# EAGLE board V1.2_Esquema general (EAGLE 5.11)
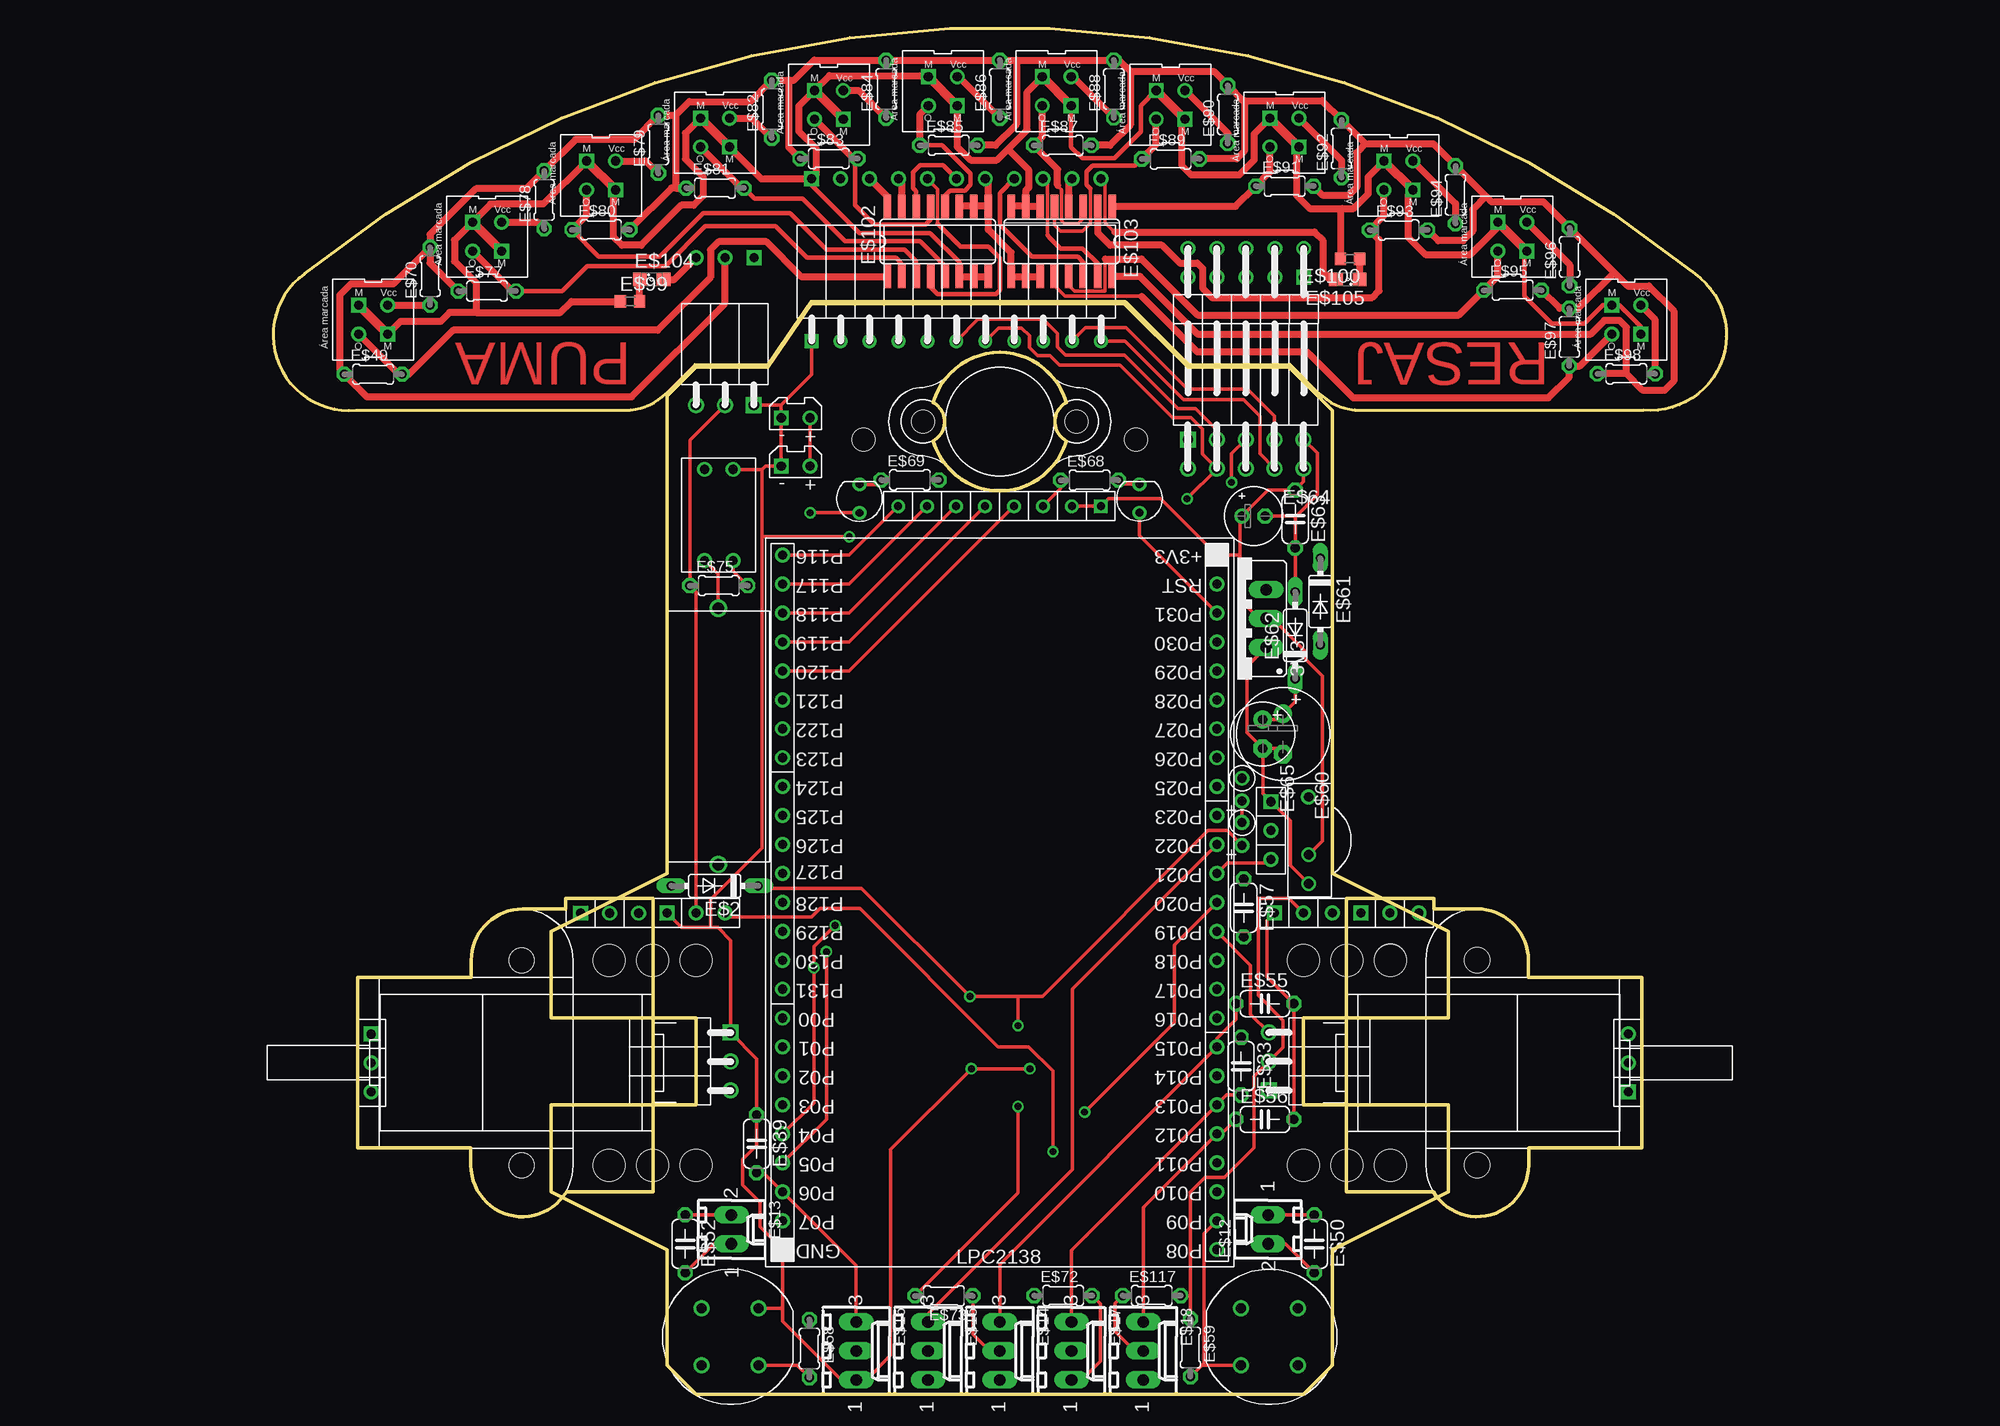
[diagram p0: board, top side]
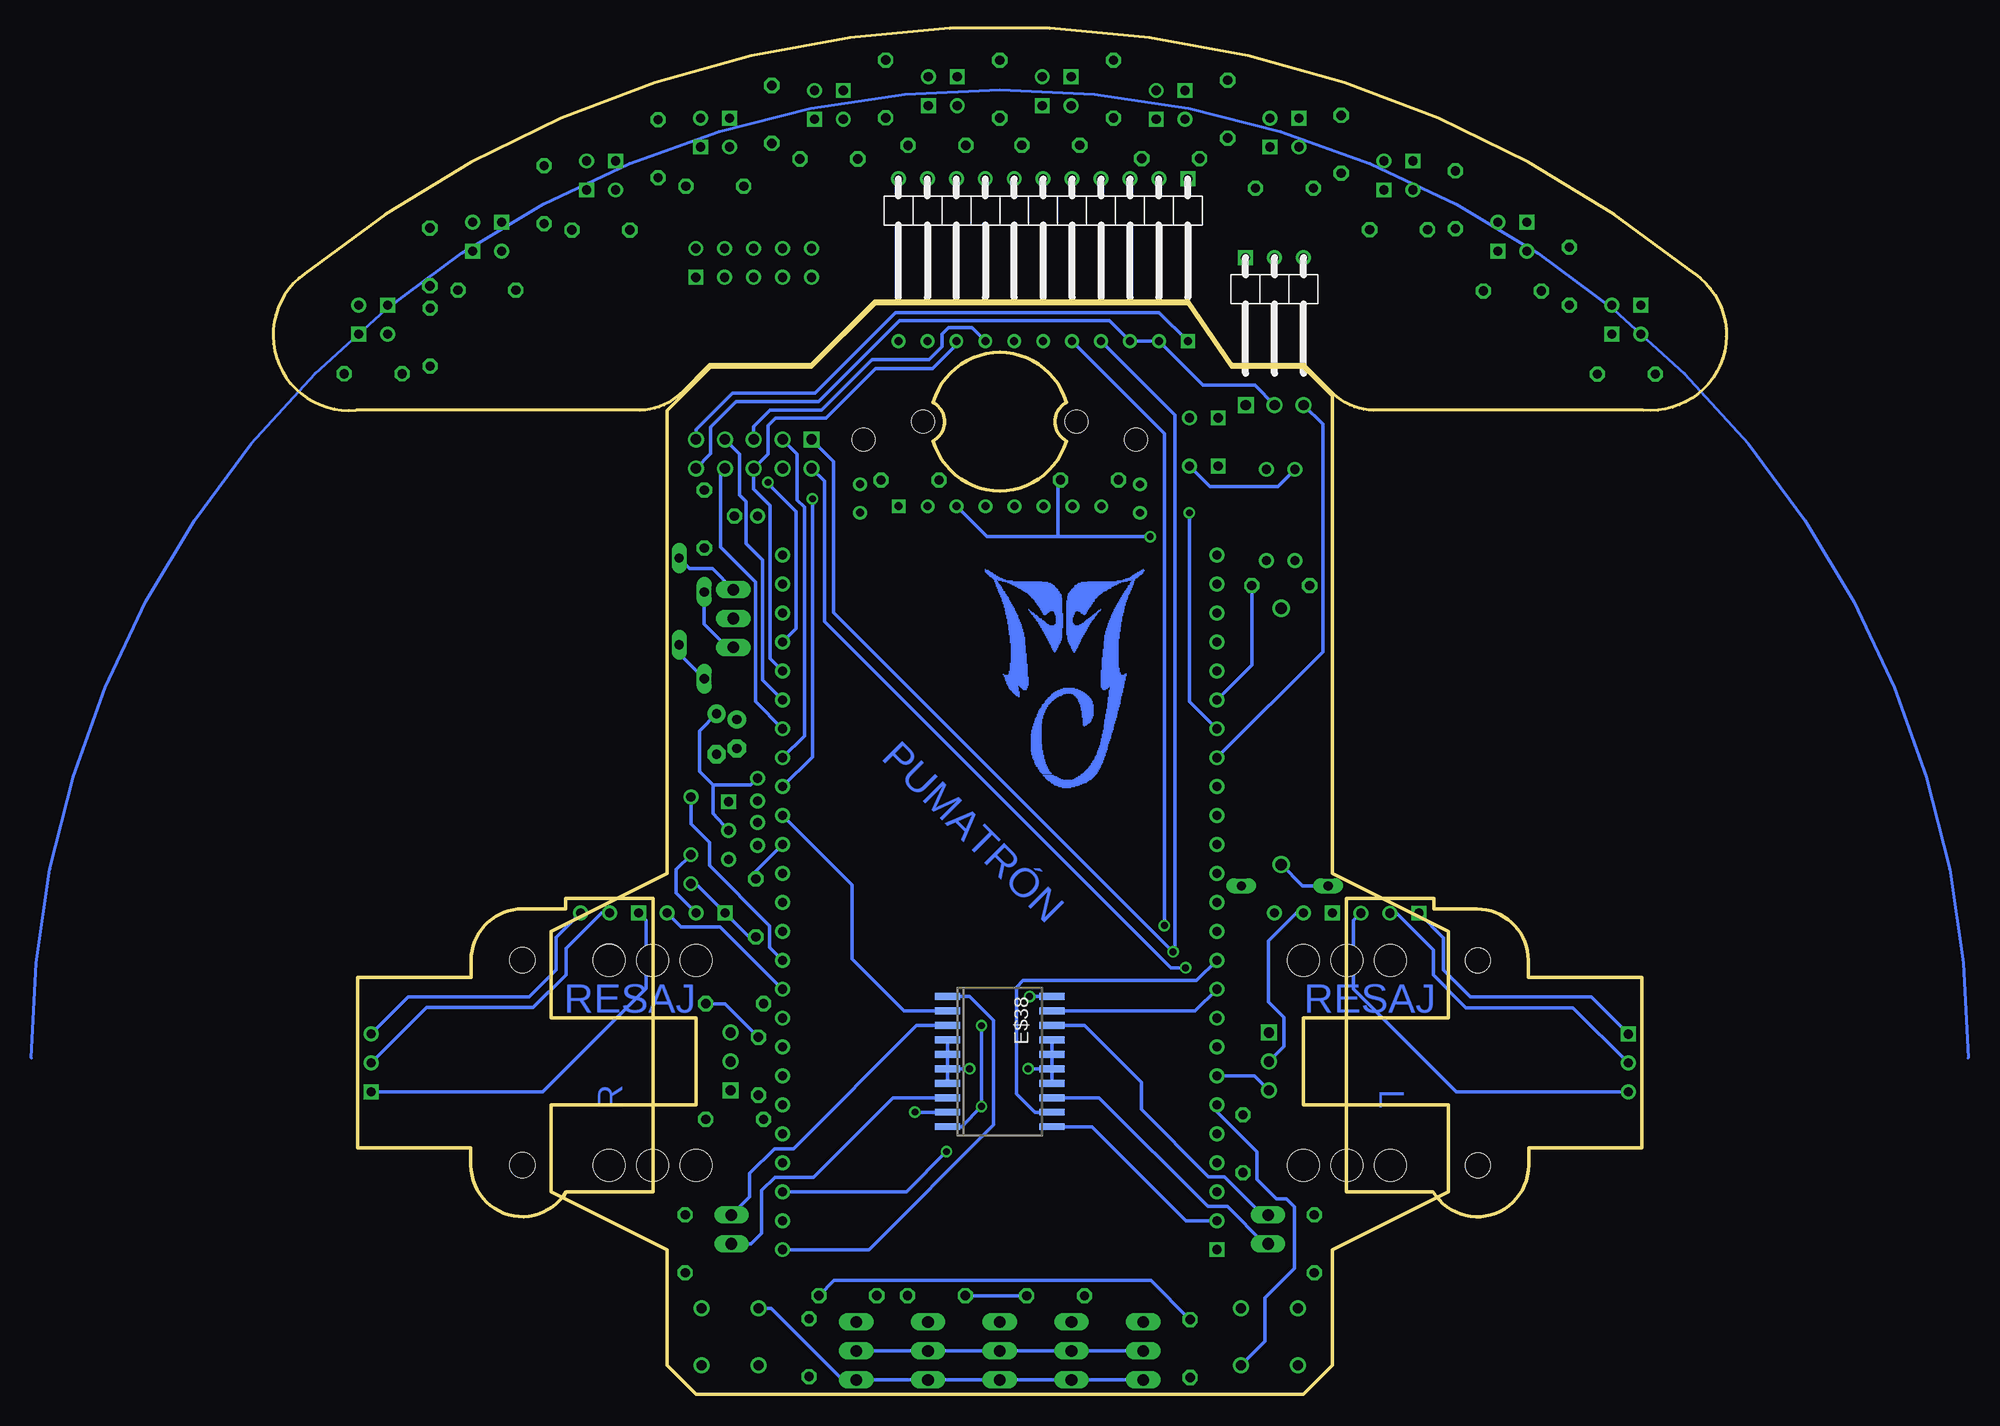
[diagram p1: board, bottom side, seen from below]

Size 127.55 x 119.9 mm. Coordinates in mm from the lower left corner, seen from the top.
Outline: 110.2,36.61 120.16,36.61 120.16,21.62 110.2,21.62 110.2,20.1 arc-149 101.82,17.79 94.2,17.79 94.2,43.54 101.87,43.54 101.87,42.6 105.68,42.6 arc-90 110.17,38.11 110.17,36.61
Outline: 17.35,36.6 7.4,36.6 7.4,21.61 17.35,21.61 17.35,20.09 arc149 25.74,17.78 33.36,17.78 33.36,43.53 25.68,43.53 25.68,42.59 21.87,42.59 arc90 17.38,38.1 17.38,36.6
Outline: 34.57,45.72 24.41,40.64 24.41,33.02 37.11,33.02 37.11,25.4 24.41,25.4 24.41,17.78 34.57,12.7 34.57,2.54 37.11,0 90.45,0 92.99,2.54 92.99,12.7 103.15,17.78 103.15,25.4 90.45,25.4 90.45,33.02 103.15,33.02 103.15,40.64 92.99,45.72 92.99,86.36 89.18,90.17 80.29,90.17 74.7,95.76 47.27,95.76 43.46,90.17 37.11,90.17 34.57,87.63 34.57,45.72
Outline: 69.62,87.07 arc148 57.93,87.07 arc-122 57.93,83.69 arc148 69.62,83.69 arc-122 69.62,87.07
Outline: 2.78,98.39 arc-78 124.78,98.39 arc-150 120.28,86.39 95.35,86.39 arc-45 91.81,87.86 89.28,90.39 80.38,90.37 74.81,95.94 47.2,95.94 43.4,90.39 37.03,90.39 34.49,87.86 arc-45 30.95,86.39 7.28,86.39 arc-150 2.78,98.39
Copper layers (1*16): Top 0.035mm / dielectric 1.5mm / Bottom 0.035mm
Design rules "default": minimum track width 10mil, minimum drill 24mil, track to track 8mil, track to pad 8mil, pad to pad 8mil, via to via 8mil, smd to smd 8mil, copper to edge 40mil, drill to drill 8mil, minimum pad ring 10mil, minimum via ring 8mil, stop-mask expansion 4mil, vias tented up to drill 0mil, thermal gap 10mil
Holes 2.8 mm at 90.45,38.1 90.45,20.09 94.26,38.1 94.26,20.09 37.11,38.1 33.3,38.1 37.11,20.09 33.3,20.09 29.49,38.1 29.49,20.09 98.07,38.1 98.07,20.09 98.06,38.11 98.06,20.1 29.49,38.1 29.49,20.09
Holes 2 mm at 51.84,83.82 75.71,83.82

## Footprints (pad centres in the part's own frame; a part is rotated, then mirrored left to right if it is on the bottom)
TO220S = drill 1.016 long: 1 -2.54,-2.54; 2 0,-2.54; 3 2.54,-2.54
LPC2138 = drill 0.8 square: P$1 30.48,-10.16 | drill 0.8 round: P$2 -27.94,-10.16; P$3 -25.4,-10.16; P$4 -22.86,-10.16; P$5 -20.32,-10.16; P$6 -17.78,-10.16; P$7 -15.24,-10.16; P$8 -12.7,-10.16; P$9 -10.16,-10.16; P$10 -7.62,-10.16; P$11 -5.08,-10.16; P$12 -2.54,-10.16; P$13 0,-10.16; P$14 2.54,-10.16; P$15 5.08,-10.16; P$16 7.62,-10.16; P$17 10.16,-10.16; P$18 12.7,-10.16; P$19 15.24,-10.16; P$20 17.78,-10.16; P$21 20.32,-10.16; P$22 22.86,-10.16; P$23 25.4,-10.16; P$24 27.94,-10.16; P$25 -30.48,-10.16; P$26 30.48,27.94; P$27 27.94,27.94; P$28 25.4,27.94; P$29 22.86,27.94; P$30 20.32,27.94; P$31 17.78,27.94; P$32 15.24,27.94; P$33 12.7,27.94; P$34 10.16,27.94; P$35 7.62,27.94; P$36 5.08,27.94; P$37 2.54,27.94; P$38 0,27.94; P$39 -2.54,27.94; P$40 -5.08,27.94; P$41 -7.62,27.94; P$42 -10.16,27.94; P$43 -12.7,27.94; P$44 -15.24,27.94; P$45 -17.78,27.94; P$46 -20.32,27.94; P$47 -22.86,27.94; P$48 -25.4,27.94; P$49 -27.94,27.94; P$50 -30.48,27.94
DO35-7B = drill 0.813 long: A 3.81,0; C -3.81,0
DIODO_VERTICAL = drill 0.8 round: P$1 0,0; P$2 2,0
TIRADE3PINESHEMBRATUMBADOS = drill 0.9 round: P$1 1.27,-1.778; P$2 3.81,-1.778 | drill 0.9 square: P$3 6.35,-1.778
PULSADOR = drill 0.9 round: P$1 0,0; P$2 0,5; P$3 5,5; P$4 5,0
RUEDA_LOCA_0.375'' = hole 2: -6.75,0; 6.75,0
TSOP31238 = drill 0.8 round: P$1 1.2,1.8; P$3 6.274,1.803; P$4 8.814,1.803
CNY70 = drill 0.8 square: P$1 -1.27,1.27; P$2 1.27,-1.27 | drill 0.8 round: P$3 1.27,1.27; P$4 -1.27,-1.27
SOPORTE_FUSIBLE = drill 1 round: P$2 -0.25,4.5; P$3 22.25,4.5
6410-02 = drill 1.016 long: 1 1.27,0; 2 -1.27,0
6410-03 = drill 1.016 long: 1 2.54,0; 2 0,0; 3 -2.54,0
TIRADE3PINES = drill 0.8 square: P$1 1.27,1.27 | drill 0.8 round: P$2 3.81,1.27; P$3 6.35,1.27
SOPORTE_EXTENDIDO_MICROMOTOR = hole 2.2: -1.5,4.5; 16.5,4.5
TIRADE11PINESTUMBADOS = drill 0.7 square: P$1 1.27,-2.032 | drill 0.7 round: P$2 3.81,-2.032; P$3 6.35,-2.032; P$4 8.89,-2.032; P$5 11.43,-2.032; P$6 13.97,-2.032; P$7 16.51,-2.032; P$8 19.05,-2.032; P$9 21.59,-2.032; P$10 24.13,-2.032; P$11 26.67,-2.032
BATERIA_LIPO = drill 0.8 square: P$1 0,0 | drill 0.8 round: P$2 2.54,0
C050-024X044 = drill 0.813 octagon: 1 -2.54,0; 2 2.54,0
CON_RT_ANG_2X5 = drill 0.9 square: P$1 1.27,-1.27 | drill 0.9 round: P$2 3.81,-1.27; P$3 6.35,-1.27; P$4 8.89,-1.27; P$5 11.43,-1.27; P$6 11.43,-3.81; P$7 8.89,-3.81; P$8 6.35,-3.81; P$9 3.81,-3.81; P$10 1.27,-3.81
TIRADE8PINES = drill 0.7 square: P$1 1.27,1.27 | drill 0.7 round: P$2 3.81,1.27; P$3 6.35,1.27; P$4 8.89,1.27; P$5 11.43,1.27; P$6 13.97,1.27; P$7 16.51,1.27; P$8 19.05,1.27
SO20W = smd 0.6 x 2.2: 1 -5.715,-4.6; 2 -4.445,-4.6; 3 -3.175,-4.6; 4 -1.905,-4.6; 5 -0.635,-4.6; 6 0.635,-4.6; 7 1.905,-4.6; 8 3.175,-4.6; 9 4.445,-4.6; 10 5.715,-4.6; 11 5.715,4.6; 12 4.445,4.6; 13 3.175,4.6; 14 1.905,4.6; 15 0.635,4.6; 16 -0.635,4.6; 17 -1.905,4.6; 18 -3.175,4.6; 19 -4.445,4.6; 20 -5.715,4.6
TIRADE3PINESTUMBADOS = drill 0.8 round: P$1 1.27,-1.524; P$2 3.81,-1.524 | drill 0.8 square: P$3 6.35,-1.524
CON_M_RT_ANG_2X5 = drill 0.8 round: P$1 -4.064,11.43; P$3 -1.524,8.89; P$4 -4.064,8.89; P$5 -4.064,6.35; P$6 -4.064,3.81; P$7 -4.064,1.27; P$8 -1.524,1.27; P$9 -1.524,3.81; P$10 -1.524,6.35 | drill 0.8 square: P$2 -1.524,11.43
0204/5 = drill 0.813 octagon: 1 -2.54,0; 2 2.54,0
E3,5-8 = drill 0.813 pad 1.6 round: + -1.778,0 | drill 0.813 pad 1.6 octagon: - 1.778,0
DO35Z7 = drill 0.813 long: A 3.81,0; C -3.81,0
E2-5 = drill 0.813 pad 1.27 round: + -1.016,0 | drill 0.813 pad 1.27 octagon: - 1.016,0
E2,5-6 = drill 0.813 pad 1.6 round: + -1.27,0 | drill 0.813 pad 1.6 octagon: - 1.27,0
LED = drill 0.7 round: P$1 0,1.25; P$2 0,-1.25
MICROINTERRUPTOR_DOBLE = drill 0.8 round: P$1 1,2; P$2 1,4.5; P$3 9,4.5; P$4 9,2
R0603 = smd 1 x 1.1: 1 -0.85,0; 2 0.85,0
11_PINES_MACHO_TUMBADOS = drill 0.8 round: P$1 3.81,-1.524; P$2 6.35,-1.524; P$3 8.89,-1.524; P$4 11.43,-1.524; P$5 13.97,-1.524; P$6 16.51,-1.524; P$7 19.05,-1.524; P$8 21.59,-1.524; P$9 24.13,-1.524; P$10 26.67,-1.524 | drill 0.8 square: P$11 1.27,-1.524
SO16 = smd 0.66 x 2.032: 1 -4.445,-3.073; 2 -3.175,-3.073; 3 -1.905,-3.073; 4 -0.635,-3.073; 5 0.635,-3.073; 6 1.905,-3.073; 7 3.175,-3.073; 8 4.445,-3.073; 9 4.445,3.073; 10 3.175,3.073; 11 1.905,3.073; 12 0.635,3.073; 13 -0.635,3.073; 14 -1.905,3.073; 15 -3.175,3.073; 16 -4.445,3.073
SML0805 = smd 1.2 x 1.2: A 1.05,0; C -1.05,0

## Placement (x,y rotation side)
3V3  [TO220S]  84.63,68.1 90 top
E$1  [LPC2138]  54.89,43.18 270 top
E$2  [DO35-7B]  38.76,44.63 180 top
E$3  [DIODO_VERTICAL]  85.03,50.19 270 top
E$4  [TIRADE3PINESHEMBRATUMBADOS]  35.84,88.62 0 top
E$5  [MICROMOTOR]  94.2,35.09 270 top
E$6  [PULSADOR]  37.61,7.54 270 top
E$7  [PULSADOR]  89.94,2.54 90 top
E$8  [RUEDA_LOCA_0.375'']  63.78,85.39 0 top
E$9  [TSOP31238]  89.09,53.64 270 top
E$10  [CNY70]  28.78,106.99 0 top
E$11  [SOPORTE_FUSIBLE]  34.57,68.75 270 top
E$12  [6410-02]  87.32,14.48 90 top
E$13  [6410-02]  40.23,14.48 270 top
E$14  [6410-03]  63.78,3.81 270 top
E$15  [6410-03]  57.48,3.81 270 top
E$16  [6410-03]  51.18,3.81 270 top
E$17  [6410-03]  70.07,3.81 270 top
E$18  [6410-03]  76.37,3.81 270 top
E$19  [TIRADE3PINES]  94.22,40.98 0 top
E$20  [CNY70]  88.78,110.76 0 top
E$21  [SOPORTE_EXTENDIDO_MICROMOTOR]  101.18,36.61 270 top
E$22  [CNY70]  98.78,106.99 0 top
E$23  [CNY70]  108.78,101.63 0 top
E$24  [TIRADE11PINESTUMBADOS]  46,94.49 0 top
E$25  [BATERIA_LIPO]  44.6,85.71 0 top
E$26  [BATERIA_LIPO]  44.6,81.48 0 top
E$27  [TIRADE3PINES]  120.21,25.28 90 top
E$28  [CNY70]  78.78,113.18 0 top
E$29  [TIRADE3PINES]  86.61,40.97 0 top
E$30  [TIRADE3PINES]  86.3,53.29 270 top
E$31  [MICROMOTOR]  33.38,23.11 90 top
E$32  [TIRADE3PINES]  33.32,40.97 0 top
E$33  [C050-024X044]  84.96,28.8 270 top
E$34  [TIRADE3PINESHEMBRATUMBADOS]  89.18,33.02 270 top
E$35  [CON_RT_ANG_2X5]  79.02,85.09 0 top
E$36  [TIRADE8PINES]  73.91,79.22 180 top
E$37  [TIRADE3PINESHEMBRATUMBADOS]  38.38,25.4 90 top
E$38  [SO20W]  63.78,29.21 270 bottom
E$39  [C050-024X044]  42.44,22 270 top
E$40  [CNY70]  68.78,114.37 0 top
E$41  [CNY70]  58.78,114.37 0 top
E$42  [CNY70]  118.78,94.33 0 top
E$43  [CNY70]  48.78,113.18 0 top
E$44  [TIRADE3PINESTUMBADOS]  35.85,98.26 180 bottom
E$45  [CON_M_RT_ANG_2X5]  79.03,96.52 270 top
E$46  [CNY70]  38.78,110.76 0 top
E$47  [CNY70]  18.78,101.63 0 top
E$48  [CNY70]  8.78,94.33 0 top
E$49  [0204/5]  8.78,89.54 0 top
E$50  [C050-024X044]  91.38,13.21 270 top
E$51  [SOPORTE_EXTENDIDO_MICROMOTOR]  26.32,21.59 90 top
E$52  [C050-024X044]  36.17,13.21 270 top
E$53  [TIRADE3PINES]  25.71,40.97 0 top
E$54  [TIRADE3PINES]  7.35,32.89 270 top
E$55  [C050-024X044]  87.04,34.29 0 top
E$56  [C050-024X044]  87.04,24.13 0 top
E$57  [C050-024X044]  85.19,42.7 270 top
E$58  [0204/5]  47.06,4.01 270 top
E$59  [0204/5]  80.51,4.09 270 top
E$60  [E3,5-8]  88.64,57.96 270 top
E$61  [DO35-7B]  91.92,69.6 270 top
E$62  [DO35Z7]  89.71,66.62 90 top
E$63  [C050-024X044]  89.71,76.84 270 top
E$64  [E2-5]  86.05,77.09 0 top
E$65  [E2,5-6]  86.86,57.96 270 top
E$66  [LED]  76.04,78.64 0 top
E$67  [LED]  51.46,78.63 0 top
E$68  [0204/5]  71.66,80.24 0 top
E$69  [0204/5]  55.89,80.27 0 top
E$70  [0204/5]  13.78,98.15 90 top
E$71  [IMAGEN_MJ_GRANDE]  58.11,67.13 0 bottom
E$72  [0204/5]  69.34,8.66 0 top
E$73  [0204/5]  58.87,8.64 180 top
E$74  [MICROINTERRUPTOR_DOBLE]  35.86,82.19 270 top
E$75  [0204/5]  39.11,70.99 0 top
E$76  [DIODO_VERTICAL]  85.03,54.08 270 top
E$77  [0204/5]  18.78,96.85 0 top
E$78  [0204/5]  23.79,104.85 90 top
E$79  [0204/5]  33.81,109.72 90 top
E$80  [0204/5]  28.77,102.22 0 top
E$81  [0204/5]  38.79,105.88 0 top
E$82  [0204/5]  43.77,112.81 90 top
E$83  [0204/5]  48.78,108.48 0 top
E$84  [0204/5]  53.8,114.57 90 top
E$85  [0204/5]  59.3,109.64 0 top
E$86  [0204/5]  63.78,114.57 90 top
E$87  [0204/5]  69.3,109.63 0 top
E$88  [0204/5]  73.79,114.58 90 top
E$89  [0204/5]  78.78,108.44 0 top
E$90  [0204/5]  83.79,112.35 90 top
E$91  [0204/5]  88.79,106.05 0 top
E$92  [0204/5]  93.77,109.34 90 top
E$93  [0204/5]  98.79,102.2 0 top
E$94  [0204/5]  103.78,105.3 90 top
E$95  [0204/5]  108.8,96.92 0 top
E$96  [0204/5]  113.8,99.84 90 top
E$97  [0204/5]  113.77,92.8 90 top
E$98  [0204/5]  118.78,89.58 0 top
E$99  [R0603]  31.32,95.93 0 top
E$100  [R0603]  94.53,99.68 180 top
E$101  [11_PINES_MACHO_TUMBADOS]  46,105.17 180 bottom
E$102  [SO16]  58.34,101.2 0 top
E$103  [SO16]  69.22,101.2 180 top
E$104  [SML0805]  33.23,97.86 0 top
E$105  [SML0805]  94.33,97.86 180 top
E$117  [0204/5]  77.11,8.66 0 top

## Library data of the parts
3V3 = v-reg
E$1 E$3-E$11 E$19-E$32 E$34-E$37 E$40-E$48 E$51 E$53 E$54 E$66 E$67 E$71 E$74 E$76 E$101 = Robot
E$2 E$61 E$62 = diode
E$12-E$18 = con-molex
E$33 E$39 E$49 E$50 E$52 E$55-E$60 E$63-E$65 E$68-E$70 E$72 E$73 E$75 E$77-E$100 E$117 = resistor
E$38 = smd-ipc
E$102 E$103 = 40xx
E$104 E$105 = led

## Nets
S$1: E$1.P$8 E$4.P$1
S$2: E$1.P$35 E$29.P$3
S$3: E$99.2 E$104.C
S$5: E$46.P$4 E$81.2 E$102.5
S$6: E$42.P$4 E$97.1 E$103.12
S$7: E$23.P$4 E$95.1 E$103.13
S$8: E$22.P$4 E$93.1 E$103.2
S$9: E$20.P$4 E$91.1 E$103.1
S$10: E$28.P$4 E$89.1 E$103.5
S$11: E$40.P$4 E$87.1 E$103.3
S$12: E$19.P$3 E$27.P$3
S$13: E$19.P$2 E$27.P$2
S$14: E$41.P$4 E$85.1 E$102.12
S$15: E$19.P$1 E$27.P$1
S$16: E$11.P$2 E$74.P$4
S$17: E$13.1 E$38.13 E$52.2
S$18: E$1.P$26 E$38.1
S$19: 3V3.3 E$61.C
S$20: E$1.P$25 E$36.P$8
S$21: E$1.P$2 E$36.P$7
S$22: E$53.P$3 E$54.P$3
S$23: E$53.P$2 E$54.P$2
S$24: E$53.P$1 E$54.P$1
S$25: E$1.P$3 E$36.P$6
S$26: E$1.P$4 E$36.P$5
S$27: E$1.P$5 E$36.P$4
S$28: E$1.P$36 E$9.P$1
S$29: E$1.P$6 E$74.P$3 E$75.2
S$30: E$1.P$37 E$34.P$1
S$31: E$1.P$39 E$30.P$3
S$32: E$2.A E$11.P$3
S$33: E$13.2 E$38.18 E$52.1
S$34: E$1.P$33 E$14.3 E$55.1
S$35: E$1.P$16 E$38.19
S$36: E$1.P$22 E$24.P$4 E$35.P$1
S$37: E$1.P$21 E$24.P$5 E$35.P$10
S$38: E$1.P$20 E$6.P$3 E$58.2
S$39: E$1.P$19 E$37.P$1
S$40: E$1.P$27 E$7.P$2 E$59.2
S$41: E$1.P$30 E$18.3 E$56.1
S$42: E$1.P$31 E$17.3 E$33.2
S$43: E$1.P$28 E$32.P$3
S$44: E$1.P$48 E$66.P$2
S$45: E$1.P$43 E$24.P$6 E$35.P$2
S$46: E$1.P$42 E$24.P$7 E$35.P$9
S$47: E$1.P$47 E$24.P$8 E$35.P$3
S$48: E$1.P$46 E$24.P$9 E$35.P$8
S$49: E$1.P$45 E$24.P$10 E$35.P$4
S$50: E$1.P$44 E$24.P$11 E$35.P$7
S$51: E$1.P$23 E$16.3 E$39.2
S$52: E$30.P$2 E$60.+ E$61.A E$62.C E$65.+ E$76.P$1
S$53: E$12.1 E$38.3 E$50.1
S$54: E$12.2 E$38.8 E$50.2
S$55: E$1.P$24 E$38.11
S$56: E$2.C E$3.P$2 E$38.10 E$38.20 E$73.2
S$57: E$44.P$2 E$49.1 E$70.2 E$77.1 E$78.2 E$79.2 E$80.2 E$81.1 E$82.2 E$83.1 E$84.2 E$85.2 E$86.2 E$87.2 E$88.2 E$89.2 E$90.2 E$91.2 E$92.2 E$93.2 E$94.2 E$95.2 E$96.2 E$97.2 E$98.1 E$103.16
S$58: E$3.P$1 E$76.P$2
S$59: E$1.P$38 E$38.9
S$60: E$1.P$41 E$38.2
S$61: E$1.P$15 E$38.12
S$62: E$66.P$1 E$68.2
S$63: E$67.P$1 E$69.1
S$64: 3V3.1 E$1.P$1 E$4.P$3 E$6.P$2 E$7.P$3 E$9.P$4 E$14.1 E$15.1 E$16.1 E$17.1 E$18.1 E$24.P$1 E$25.P$1 E$26.P$1 E$29.P$1 E$30.P$1 E$32.P$1 E$33.1 E$34.P$3 E$35.P$5 E$36.P$3 E$37.P$3 E$38.4 E$38.5 E$38.6 E$38.7 E$38.14 E$38.15 E$38.16 E$38.17 E$39.1 E$55.2 E$56.2 E$57.2 E$60.- E$62.A E$63.2 E$64.- E$65.- E$68.1 E$69.2 E$72.2 E$74.P$2
S$65: E$1.P$40 E$15.3 E$57.1
S$66: E$47.P$4 E$77.2 E$102.2
S$67: E$25.P$2 E$26.P$2 E$74.P$1
S$68: E$14.2 E$15.2 E$16.2 E$17.2 E$18.2 E$72.1 E$73.1 E$117.1
S$69: E$101.P$5 E$102.14
S$70: E$48.P$4 E$49.2 E$102.1
S$71: E$43.P$4 E$83.2 E$102.13
S$72: E$101.P$7 E$103.14
S$73: E$48.P$3 E$70.1
S$74: E$47.P$3 E$78.1
S$75: E$10.P$3 E$79.1
S$76: E$46.P$3 E$82.1
S$77: E$43.P$3 E$84.1
S$78: E$41.P$3 E$86.1
S$79: E$40.P$3 E$88.1
S$80: E$28.P$3 E$90.1
S$81: E$20.P$3 E$92.1
S$82: E$22.P$3 E$94.1
S$83: E$23.P$3 E$96.1
S$84: E$42.P$3 E$98.2
S$85: E$44.P$1 E$104.A
S$86: E$100.1 E$105.C
S$87: E$101.P$8 E$103.15
S$88: E$101.P$3 E$102.15
S$89: E$101.P$2 E$102.16
S$90: E$101.P$6 E$102.9 E$102.10 E$102.11 E$103.9 E$103.10 E$103.11
S$91: E$101.P$9 E$103.4
S$93: E$10.P$4 E$80.1 E$102.3
S$94: E$101.P$4 E$102.4
S$95: E$101.P$10 E$105.A
S$96: E$10.P$1 E$10.P$2 E$20.P$1 E$20.P$2 E$22.P$1 E$22.P$2 E$23.P$1 E$23.P$2 E$28.P$1 E$28.P$2 E$40.P$1 E$40.P$2 E$41.P$1 E$41.P$2 E$42.P$1 E$42.P$2 E$43.P$1 E$43.P$2 E$46.P$1 E$46.P$2 E$47.P$1 E$47.P$2 E$48.P$1 E$48.P$2 E$99.1 E$100.2 E$101.P$11 E$102.6 E$102.7 E$102.8 E$103.6 E$103.7 E$103.8
S$109: 3V3.2 E$1.P$50 E$4.P$2 E$9.P$3 E$24.P$2 E$24.P$3 E$29.P$2 E$32.P$2 E$34.P$2 E$35.P$6 E$36.P$1 E$36.P$2 E$37.P$2 E$58.1 E$59.1 E$63.1 E$64.+ E$75.1 E$117.2
S$113: E$1.P$7 E$67.P$2

## Tracks (layer width: path | path; a pad name or v marks a point on that pad's centre or on a via)
S$1
  Bottom 0.305: E$4.P$1 35.43,85.17 35.43,65.18 E$1.P$8
S$2
  Bottom 0.305: E$29.P$3 91.77,41.05 88.31,41.05 E$1.P$35
S$3
  Top 0.61: E$99.2 E$104.C
S$4
  Bottom 0.254: 148.78,29.51 arc180 -21.22,29.51
S$5
  Top 0.406: E$102.5 58.97,99.05 56.8,101.22 50.19,101.22 46.48,104.93 42.28,104.93 E$81.2
  Top 0.61: E$46.P$4 41.12,105.88 E$81.2
S$6
  Top 0.305: E$103.12 68.58,97.32 69.52,96.38 76.24,96.38
  Top 0.61: E$42.P$4 114.71,90.26 E$97.1 113.77,89.3 111.95,87.48 94.78,87.48 90.74,91.52 81.1,91.52 76.24,96.38
S$7
  Top 0.305: E$103.13 69.85,97.33 70.34,96.84 73.02,96.84 73.02,99.66
  Top 0.61: E$23.P$4 107.51,98.17 E$95.1 104.07,94.73 81.15,94.73 76.22,99.66 73.02,99.66
S$8
  Top 0.61: E$22.P$4 97.51,103.46 E$93.1 97.08,101.37 97.08,96.87 96.49,96.28 82.4,96.28 81.58,97.1 81.58,98.84 81.12,99.3 79.58,99.3 78.03,100.85 73.47,100.85 72.39,101.93 E$103.2
S$9
  Top 0.61: E$20.P$4 87.51,107.31 E$91.1 84.47,104.28 E$103.1
S$10
  Top 0.305: E$103.5 68.58,102.65 69.12,102.11 71.06,102.11 71.76,102.81 71.76,105.84
  Top 0.406: 71.76,105.84 71.41,106.19 71.41,107.32 71.93,107.84 75.64,107.84 E$89.1
  Top 0.61: E$89.1 77.51,109.71 E$28.P$4
S$11
  Top 0.305: E$103.3 71.12,103.25 70.63,102.75 69.47,102.75 69.22,103 69.22,105.76 68.86,106.12
  Top 0.61: E$40.P$4 67.51,110.38 E$87.1 68.86,107.53 68.86,106.12
S$12
  Bottom 0.305: E$27.P$3 115.69,34.88 105.09,34.88 102.73,37.25 102.73,40.09 E$19.P$3
S$13
  Bottom 0.305: E$27.P$2 114.09,33.94 104.71,33.94 101.84,36.81 101.84,39.12 98.71,42.25 E$19.P$2
S$14
  Top 0.406: E$102.12 58.97,105.23 59.42,105.67 60.72,105.67 61.22,106.17 61.22,107.15 58.72,109.65 E$85.1
  Top 0.61: E$41.P$4 56.76,112.35 E$85.1
S$15
  Bottom 0.305: E$27.P$1 103.9,26.55 94.83,35.62 94.83,41.59 E$19.P$1
S$16
  Top 0.305: E$74.P$4 39.07,71.99 E$11.P$2
S$17
  Top 0.305: E$13.1 38.71,13.21 E$52.2
  Bottom 0.305: E$13.1 40.53,13.21 43.81,16.48 45.51,16.48 55.06,26.03 E$38.13
S$18
  Bottom 0.305: E$38.1 66.42,34.92 64.31,32.82 64.31,23.65 75.26,12.7 E$1.P$26
S$19
  Bottom 0.305: E$61.C 91,72.49 89,72.49 87.17,70.66 3V3.3
S$20
  Top 0.305: E$36.P$8 50.57,73.66 E$1.P$25
S$21
  Top 0.305: E$36.P$7 50.57,71.12 E$1.P$2
S$22
  Bottom 0.305: E$54.P$3 23.68,26.54 32.72,35.58 32.72,41.58 E$53.P$3
S$23
  Bottom 0.305: E$54.P$2 13.47,33.93 22.84,33.93 25.71,36.8 25.71,39 28.94,42.24 E$53.P$2
S$24
  Bottom 0.305: E$54.P$1 11.87,34.87 22.46,34.87 24.82,37.23 24.82,40.08 E$53.P$1
S$25
  Top 0.305: E$36.P$6 50.57,68.58 E$1.P$3
S$26
  Top 0.305: E$36.P$5 50.57,66.04 E$1.P$4
S$27
  Top 0.305: E$36.P$4 50.57,63.5 E$1.P$5
S$28
  Bottom 0.305: E$1.P$36 83.97,39.24 83.97,41.12 89.25,46.41 89.25,48.44 90.89,50.07 E$9.P$1
S$29
  Top 0.305: E$74.P$3 40.36,72.28 E$75.2
  Bottom 0.305: E$75.2 41.65,64.03 E$1.P$6
S$30
  Top 0.305: E$1.P$37 85.8,37.67 85.8,33.35 E$34.P$1
S$31
  Top 0.305: E$30.P$3 87.3,46.66 83.77,46.66 E$1.P$39
S$32
  Bottom 0.305: E$11.P$3 37.19,44.63 E$2.A
S$33
  Top 0.305: E$13.2 E$52.1
  Bottom 0.305: E$13.2 40.71,15.75 44.04,19.08 45.44,19.08 51.35,24.99 51.35,27.38 56.36,32.38 E$38.18
S$34
  Top 0.305: E$55.1 84.5,32.92 82.83,31.24 E$1.P$33 63.78,11.43 E$14.3
S$35
  Bottom 0.305: E$1.P$16 46.63,33.65 E$38.19
S$36  (via drill 0.6)
  Top 0.305: E$1.P$22 48.56,24.16 v48.56,38.84
  Bottom 0.305: E$35.P$1 78.36,81.89 78.36,68.63 v48.56,38.84 48.38,39.01 48.38,85.95 E$24.P$4
S$37  (via drill 0.6)
  Top 0.305: E$1.P$21 47.47,25.6 v47.47,37.44 47.47,39.29 v49.32,41.15
  Bottom 0.305: v47.47,37.44 48.76,37.44 79.17,67.84 79.17,80.16 E$35.P$10 | E$24.P$5 49.32,84.35 v49.32,41.15
S$38
  Top 0.305: E$6.P$3 45.99,2.54 E$58.2
  Bottom 0.305: E$1.P$20 44.73,24.79 41.19,21.26 41.19,18.87 39.47,17.14 38.63,17.14 37.92,16.43 37.92,11.05 40.48,8.48 40.48,4.67 E$6.P$3
S$39
  Bottom 0.305: E$37.P$1 41.42,27.94 E$1.P$19
S$40
  Top 0.305: 81.76,2.54 E$7.P$2 | 81.76,2.54 81.68,2.62 81.68,14.1 E$1.P$27 | E$59.2 81.5,2.54 81.76,2.54
S$41
  Top 0.305: E$18.3 76.37,16.41 E$1.P$30 83.23,22.86 E$56.1
S$42
  Top 0.305: E$17.3 70.07,12.65 E$1.P$31 83.69,26.26 E$33.2
S$43  (via drill 0.6)
  Top 0.305: v68.45,21.31 68.45,28.37 66.32,30.51 63.62,30.51 51.49,42.63 47.99,42.63 47.27,41.91 40,41.91 E$32.P$3
  Bottom 0.305: E$1.P$28 71.98,17.78 v68.45,21.31
S$44
  Top 0.305: E$66.P$2 76.04,75.36 E$1.P$48
S$45
  Top 0.305: E$24.P$6 61.87,94.36 67.56,94.36 68.83,93.09 68.83,91.92 69.54,91.21 74.72,91.21 79.42,86.51 80.97,86.51 82.83,84.66 E$35.P$2
  Bottom 0.305: E$1.P$43 80.92,57.78 80.92,77.88 81.56,78.51 81.56,82.55 E$35.P$2
S$46  (via drill 0.6)
  Top 0.305: E$24.P$7 63.65,93.6 65.68,93.6 66.37,92.91 66.37,91.9 67.1,91.16 68.17,91.16 69.01,90.32 74.34,90.32 78.91,85.75 80.56,85.75 81.58,84.73 81.58,82.52 E$35.P$9 82.83,81.23 v80.21,78.61
  Bottom 0.305: E$1.P$42 80.21,55.96 v80.21,78.61
S$47  (via drill 0.6)
  Top 0.305: v84.12,80.06 84.12,82.58 E$35.P$3
  Bottom 0.305: E$35.P$3 85.37,84.96 83.94,86.39 79.42,86.39 75,90.8 70,90.8 68.83,91.97 68.83,93.07 68.27,93.62 66.21,93.62 E$24.P$8 | E$1.P$47 81.66,67.21 81.66,77.47 84.12,79.93 v84.12,80.06
S$48
  Bottom 0.305: E$24.P$9 67.59,92.15 69.69,90.04 74.67,90.04 79.04,85.67 83.46,85.67 84.1,85.04 84.1,82.55 E$35.P$8 85.37,79.45 83.92,78 83.92,64.59 E$1.P$46
S$49
  Top 0.305: E$24.P$10 71.29,93.62 74.85,93.62 80.23,88.24 85.52,88.24 87.91,85.85 E$35.P$4
  Bottom 0.305: E$35.P$4 86.61,82.52 86.61,78.92 86.05,78.36 86.05,74.7 84.58,73.23 84.58,62.71 E$1.P$45
S$50
  Top 0.305: E$24.P$11 74.75,92.46 79.9,87.3 85.16,87.3 86.61,85.85 86.61,82.58 E$35.P$7
  Bottom 0.305: E$1.P$44 85.21,60.81 85.21,71.32 88.26,74.37 88.26,80.92 E$35.P$7
S$51
  Top 0.305: E$39.2 43.05,19.46 E$1.P$23 51.18,11.33 E$16.3
S$52
  Top 0.305: E$65.+ 88.13,59.23 E$60.+ 89.71,60.81 E$62.C
  Bottom 0.305: E$30.P$2 88.92,51 88.92,53.47 | 88.92,53.47 90.14,54.69 90.14,58.24 E$60.+ | E$61.A 91.92,65.02 E$62.C | E$76.P$1 85.64,53.47 88.92,53.47
S$53
  Top 0.305: E$50.1 E$12.1
  Bottom 0.305: E$12.1 85.72,17.35 85.72,19.41 83.56,21.56 81.89,21.56 71.07,32.38 E$38.3
S$54
  Top 0.305: E$50.2 88.85,13.21 E$12.2
  Bottom 0.305: E$12.2 85.62,13.21 84.68,14.15 84.68,17.88 83.51,19.05 80.13,19.05 73.15,26.03 E$38.8
S$55
  Bottom 0.305: E$1.P$24 47.44,15.24 55.7,23.49 E$38.11
S$56  (via drill 0.6)
  Top 0.305: E$3.P$2 83.75,49.48 82.06,49.48 67.51,34.92 65.38,34.92 | 65.38,34.92 v65.38,32.36 | 65.38,34.92 v61.16,34.92 51.66,44.42 42.77,44.42 E$2.C | E$73.2 65.38,17.68 v65.38,25.27
  Bottom 0.305: E$38.10 67.15,23.49 v65.38,25.27 v65.38,32.36 | v61.16,34.92 E$38.20
S$57
  Top 0.61: E$80.2 34.97,105.88 35.31,105.88 | 35.31,105.88 E$81.1 | E$95.2 112.93,95.33 E$97.2 | E$97.2 | E$93.2 102.27,101.26 104.44,101.26 105.3,102.12 105.3,104 106.46,105.16 | E$91.2 92.16,105.22 94.39,105.22 95.12,105.95 95.12,108.99 95.89,109.76 | 106.46,105.16 106.95,104.67 111.51,104.67 E$96.2 117.7,98.48 | 106.46,105.16 E$94.2 101.86,109.76 95.89,109.76 | E$89.2 84.58,108.44 85.25,109.11 85.25,113.55 85.23,113.57 | 95.89,109.76 E$92.2 92.08,113.57 85.23,113.57 | 85.23,113.57 85.11,113.57 E$90.2 82.56,116.12 75.24,116.12 | E$87.2 73.46,109.63 75.24,111.41 75.24,116.12 | 75.24,116.12 74.24,117.12 E$88.2 65.24,117.11 | E$70.2 13.78,101.82 17.78,105.82 22.22,105.82 E$78.2 26.54,110.14 31.69,110.14 E$79.2 35.31,112.26 | 45.27,115.35 E$82.2 41.9,113.48 36.53,113.48 35.31,112.26 | 45.27,115.35 45.74,115.35 47.5,117.11 E$84.2 E$86.2 65.24,117.11 | 35.31,112.26 35.31,105.88 | E$70.2 10.55,97.46 6.81,97.46 5.85,96.5 5.85,89.93 E$49.1 8.21,87.57 31.48,87.57 39.66,95.75 E$44.P$2 | E$77.1 13.78,99.31 E$70.2 | E$83.1 45.26,109.46 45.26,115.34 45.27,115.35 | E$85.2 63.42,109.64 65.24,111.46 65.24,117.11 | 117.7,98.48 118.9,97.28 120.77,97.28 122.93,95.12 122.93,88.92 122.13,88.12 120.24,88.12 118.78,89.58 | E$97.2 114.56,95.33 117.7,98.48 | 118.78,89.58 118.78,93.67 118.19,94.26 116.83,94.26 115.6,93.03 81.19,93.03 76.09,98.13 E$103.16 | 118.78,89.58 E$98.1
S$58
  Top 0.305: E$3.P$1 E$76.P$2
S$59  (via drill 0.6)
  Top 0.305: v71.22,24.76 79.09,32.64 79.09,39.45 E$1.P$38
  Bottom 0.305: v71.22,24.76 E$38.9
S$60
  Bottom 0.305: E$1.P$41 76.75,44.73 76.75,38.23 72.18,33.65 E$38.2
S$61
  Bottom 0.305: 59.15,24.79 E$38.12 60.68,24.76 62.3,26.39 62.3,35.74 61.72,36.32 46.5,36.32 E$1.P$15
S$62
  Top 0.305: E$68.2 74.55,79.89 E$66.P$1
S$63
  Top 0.305: E$69.1 52.97,79.88 E$67.P$1
S$64  (via drill 0.6)
  Top 0.305: E$34.P$3 89.56,26.67 89.58,26.7 | 89.58,26.7 E$56.2 | 89.58,26.7 E$55.2 87.22,36.65 87.22,41.58 E$29.P$1 | v66.42,28.57 v61.29,28.57 54.2,21.49 54.2,3.4 52.07,1.27 E$16.1 49.86,1.27 44.73,6.4 44.73,7.54 | E$17.1 70.99,1.27 72.61,2.9 72.61,7.92 E$72.2 | E$9.P$4 89.28,46.44 89.28,50.32 E$30.P$1 86.86,52.73 E$65.- | E$60.- 88.13,56.69 E$65.- | 44.73,7.54 E$6.P$2 | E$65.- 85.47,58.09 85.47,63.88 87.14,65.56 3V3.1 | 44.73,7.54 E$1.P$1 42.74,14.68 42.74,16.84 41.22,18.36 41.22,20.62 42.44,21.84 E$39.1 42.44,29.46 E$37.P$3 40.15,39.85 39.04,40.97 38.4,40.97 | E$63.2 89.71,74.35 | E$63.2 E$62.A | E$64.- 89.63,77.09 89.71,77.01 | 89.71,77.01 E$63.2 | E$68.1 69.12,79.51 E$36.P$3 | 89.71,77.01 91.66,78.97 91.66,82.6 E$35.P$5 | E$32.P$1 35.86,40.97 38.4,40.97 | 38.4,40.97 38.4,43.46 42.92,47.98 42.92,75.28 | v50.57,75.29 42.93,75.29 42.92,75.28 | 42.92,75.28 42.92,81.19 | 42.92,81.19 E$74.P$2 | 42.92,81.19 43.2,81.48 E$26.P$1 E$25.P$1 44.6,86.84 | E$24.P$1 47.27,89.51 44.6,86.84 | 44.6,86.84 E$4.P$3
  Bottom 0.305: E$33.1 87.91,34.29 E$55.2 | E$38.4 E$38.5 E$38.6 | E$7.P$3 83.84,7.54 77.57,1.27 E$18.1 E$17.1 E$14.1 E$15.1 E$16.1 | E$38.6 E$38.7 | E$38.17 E$38.16 E$38.15 | E$38.15 E$38.14 | v66.42,28.57 E$38.6 | E$57.2 85.8,40.16 E$29.P$1 90.46,44.82 E$9.P$4 | v61.29,28.57 E$38.15 | 3V3.1 87.65,65.56 89.71,67.61 E$62.A | E$69.2 58.64,80.06 58.64,75.29 | E$36.P$3 64.89,75.29 58.64,75.29 | E$35.P$5 90.45,84.68 87.25,87.88 80.01,87.88 72.92,94.97 49.78,94.97 E$24.P$1 | 58.64,75.29 v50.57,75.29
S$65
  Top 0.305: E$15.3 57.48,7.09 70.15,19.76 70.15,35.59 E$1.P$40
  Bottom 0.305: E$1.P$40 85.19,45.9 E$57.1
S$66
  Top 0.406: E$102.2 55.16,99.26 54.66,99.76 46.88,99.76 44.11,102.53 37.93,102.53 34.44,99.04 27.56,99.04 25.37,96.85 E$77.2
  Top 0.61: E$77.2 21.02,96.85 E$47.P$4
S$67
  Top 0.305: E$25.P$2 E$26.P$2
  Bottom 0.305: E$26.P$2 45.34,79.68 39.38,79.68 E$74.P$1
S$68
  Top 0.305: E$73.1 61.41,5.28 62.89,3.81 E$14.2 | E$117.1 73.88,7.98 73.88,5.54 75.61,3.81 E$18.2
  Bottom 0.305: E$73.1 E$72.1 | E$18.2 E$17.2 E$14.2 E$15.2 E$16.2
S$69
  Top 0.406: E$102.14 56.43,105.62 56.18,105.87 56.18,107.28 56.78,107.88 58.78,107.88 E$101.P$5
S$70
  Top 0.61: E$48.P$4 11.03,89.54 E$49.2 | E$49.2 11.67,89.54 | E$102.1 46.33,98.13 43.3,101.16 39.08,101.16 38.39,100.47 38.39,98.03 33.75,93.39 15.78,93.39 11.93,89.54 E$49.2
S$71
  Top 0.406: E$102.13 57.7,103.1 57.26,102.65 52.79,102.65 51.06,104.38 51.06,108.22 E$83.2
  Top 0.61: E$43.P$4 50.94,108.48 E$83.2 51.1,108.26
S$72
  Top 0.406: E$103.14 71.12,99.35 70.63,99.84 66.63,99.84 63.8,102.67 63.8,105.45 E$101.P$7
S$73
  Top 0.61: E$48.P$3 E$70.1
S$74
  Top 0.61: E$47.P$3 23.2,102.9 E$78.1
S$75
  Top 0.61: E$10.P$3 32.73,108.26 E$79.1
S$76
  Top 0.61: E$46.P$3 42.01,112.03 E$82.1
S$77
  Top 0.61: E$43.P$3 51.38,114.45 E$84.1
S$78
  Top 0.61: E$41.P$3 60.17,115.64 E$86.1
S$79
  Top 0.61: E$40.P$3 70.19,115.64 E$88.1
S$80
  Top 0.61: E$28.P$3 83.79,110.71 E$90.1
S$81
  Top 0.61: E$20.P$3 93.77,108.31 E$92.1
S$82
  Top 0.61: E$22.P$3 103.78,104.53 E$94.1
S$83
  Top 0.61: E$23.P$3 113.8,99.15 E$96.1
S$84
  Top 0.61: E$98.2 121.32,94.33 E$42.P$3
S$85
  Top 0.61: E$104.A 35.19,97.86 E$44.P$1
S$86
  Top 0.61: E$105.C E$100.1
S$87
  Top 0.305: E$101.P$8 67.95,106.34 67.95,101.73
  Top 0.406: E$103.15 72.39,99.23 71.05,100.57 69.11,100.57 68.19,101.49 67.95,101.73
S$88
  Top 0.61: E$101.P$3 55.16,106.42 E$102.15
S$89
  Top 0.61: E$102.16 53.89,105.15 E$101.P$2
S$90
  Top 0.61: E$102.11 E$102.10 E$102.9 | E$103.11 E$103.10 E$103.9 64.77,100.23 62.78,102.22 E$102.9 | E$102.9 62.78,106.42 E$101.P$6
S$91
  Top 0.61: E$103.4 69.85,106.42 E$101.P$9
S$93
  Top 0.406: E$80.1 28.57,99.88 33.93,99.88 37.74,103.69 45.37,103.69 48.59,100.47 55.43,100.47 56.43,99.47 E$102.3
  Top 0.61: E$10.P$4 27.51,103.5 E$80.1
S$94
  Top 0.305: E$101.P$4 58.33,105.8 58.33,102.74
  Top 0.406: E$102.4 57.7,97.19 58.3,96.59 63.45,96.59 63.8,96.94 63.8,99.71 62.79,100.72 60.35,100.72 58.33,102.74
S$95
  Top 0.305: 73.87,102.02 73.03,102.86 73.03,106.34 E$101.P$10
  Top 0.61: E$105.A 92.76,97.86 92.13,98.49 92.13,101.3 91.41,102.02 73.87,102.02
S$96
  Top 0.406: E$102.6 60.24,99.37 57.68,101.93 51.47,101.93 47.27,106.14 E$101.P$11 | E$42.P$2 120.05,93.72 118.17,95.6 E$42.P$1 116.71,95.6 115.1,93.99 112.24,93.99 109.85,96.38 109.85,100.16 E$23.P$2 | E$28.P$1 76.17,113.11 76.17,110.81 73.86,108.5 71.04,108.5 70.05,109.49 E$40.P$2
  Top 0.61: E$23.P$1 107.51,102.46 105.09,100.04 101.16,100.04 99.61,101.59 99.61,105.28 E$22.P$2 | E$22.P$1 96.13,106.88 96.13,105.38 94.83,104.08 93.83,104.08 | 93.83,104.08 90.99,104.08 89.83,105.24 89.83,109.27 E$20.P$2 | E$20.P$1 86.12,110.64 86.12,108.36 84.81,107.05 80.58,107.05 79.79,107.84 79.79,111.65 E$28.P$2 | E$48.P$2 11.16,94.17 14.71,94.17 15.49,94.95 17.83,94.95 | E$103.7 E$103.6 | E$103.7 E$103.8 | E$40.P$1 66.18,114.31 66.18,110.98 64.5,109.31 | 64.5,109.31 66.32,107.49 66.32,105.9 66.04,105.63 E$103.7 | E$10.P$1 23.72,104.47 19.08,104.47 E$47.P$1 15.93,101.32 15.93,99.46 17.83,97.56 17.83,94.95 | E$41.P$1 57.39,115.76 48.82,115.76 E$43.P$1 46.15,113.09 46.15,110.85 47.68,109.32 47.68,107.1 E$101.P$11 | E$10.P$2 29.88,105.55 29.88,101.58 30.61,100.85 32.3,100.85 35.82,104.37 36.92,104.37 37.75,105.2 37.75,106.86 36.19,108.42 36.19,110.71 E$46.P$1 | E$102.8 E$102.7 E$102.6 | E$101.P$11 | E$101.P$11 42.85,106.69 E$46.P$2 | E$100.2 93.68,103.93 93.83,104.08 | E$41.P$2 60.05,109.5 61.22,108.33 63.53,108.33 64.5,109.31 | 17.83,94.95 25.21,94.95 26.19,95.93 E$99.1
  Top 0.813: E$23.P$1 E$23.P$2 | E$22.P$1 E$22.P$2 | E$20.P$1 E$20.P$2 | E$28.P$2 E$28.P$1 | E$48.P$2 E$48.P$1 | E$40.P$1 E$40.P$2 | E$47.P$1 E$47.P$2 | E$10.P$2 E$10.P$1 | E$41.P$1 E$41.P$2 | E$43.P$1 E$43.P$2 | E$46.P$1 E$46.P$2
S$109
  Top 0.305: E$29.P$2 89.15,43.51 86.48,43.51 86.48,35 88.64,32.84 88.64,30.45 E$34.P$2 86.1,27.91 86.1,21.62 83.51,19.02 81.78,19.02 80.49,17.73 80.51,17.7 80.51,8.71 | E$9.P$3 92.1,48.57 92.1,63.07 90.65,64.52 90.65,65.15 87.7,68.1 3V3.2 86.53,68.1 84.86,69.77 84.86,73.69 | E$36.P$2 E$36.P$1 73.3,78.61 77.87,78.61 E$1.P$50 84.83,73.66 84.86,73.69 | 84.86,73.69 84.86,76.91 E$64.+ 87.32,79.37 E$63.1 90.45,80.11 E$35.P$6 | E$32.P$2 37.13,70.43 E$75.1 36.57,83.77 E$4.P$2 | 80.51,8.71 E$59.1 | E$117.2 80.46,8.66 80.51,8.71
  Bottom 0.305: E$58.1 50.52,10.01 78.3,10.01 E$117.2 | E$29.P$2 92.17,43.99 92.17,46.08 E$9.P$3 | E$35.P$6 89.15,82.58 89.15,84.89 86.91,87.12 79.7,87.12 72.56,94.26 54.15,94.26 E$24.P$3 E$24.P$2 45.92,88.57 41.37,88.57 E$4.P$2 | E$37.P$2 38.83,30.53 38.83,33.1 40.18,34.44 40.18,39.78 37.72,42.24 E$32.P$2
S$113  (via drill 0.6)
  Top 0.305: E$67.P$2 v47.14,77.38
  Bottom 0.305: v47.14,77.38 47.14,60.83 E$1.P$7

## Text on the board
Top: PUMA | RESAJ
Bottom: PUMATRÓN | RESAJ | RESAJ | L | R